# Altium PCB SlowDanceGift2.PcbDoc
Units mm, origin at the board's own origin, x right, y up, seen from the top; angles counter-clockwise.
Board outline 55 x 29.5 mm, 2 copper layers (Top Layer, Bottom Layer); 68 components, 43 nets, 217 pads, 342 vias.
Unrouted connection lines stored in the file: 1.
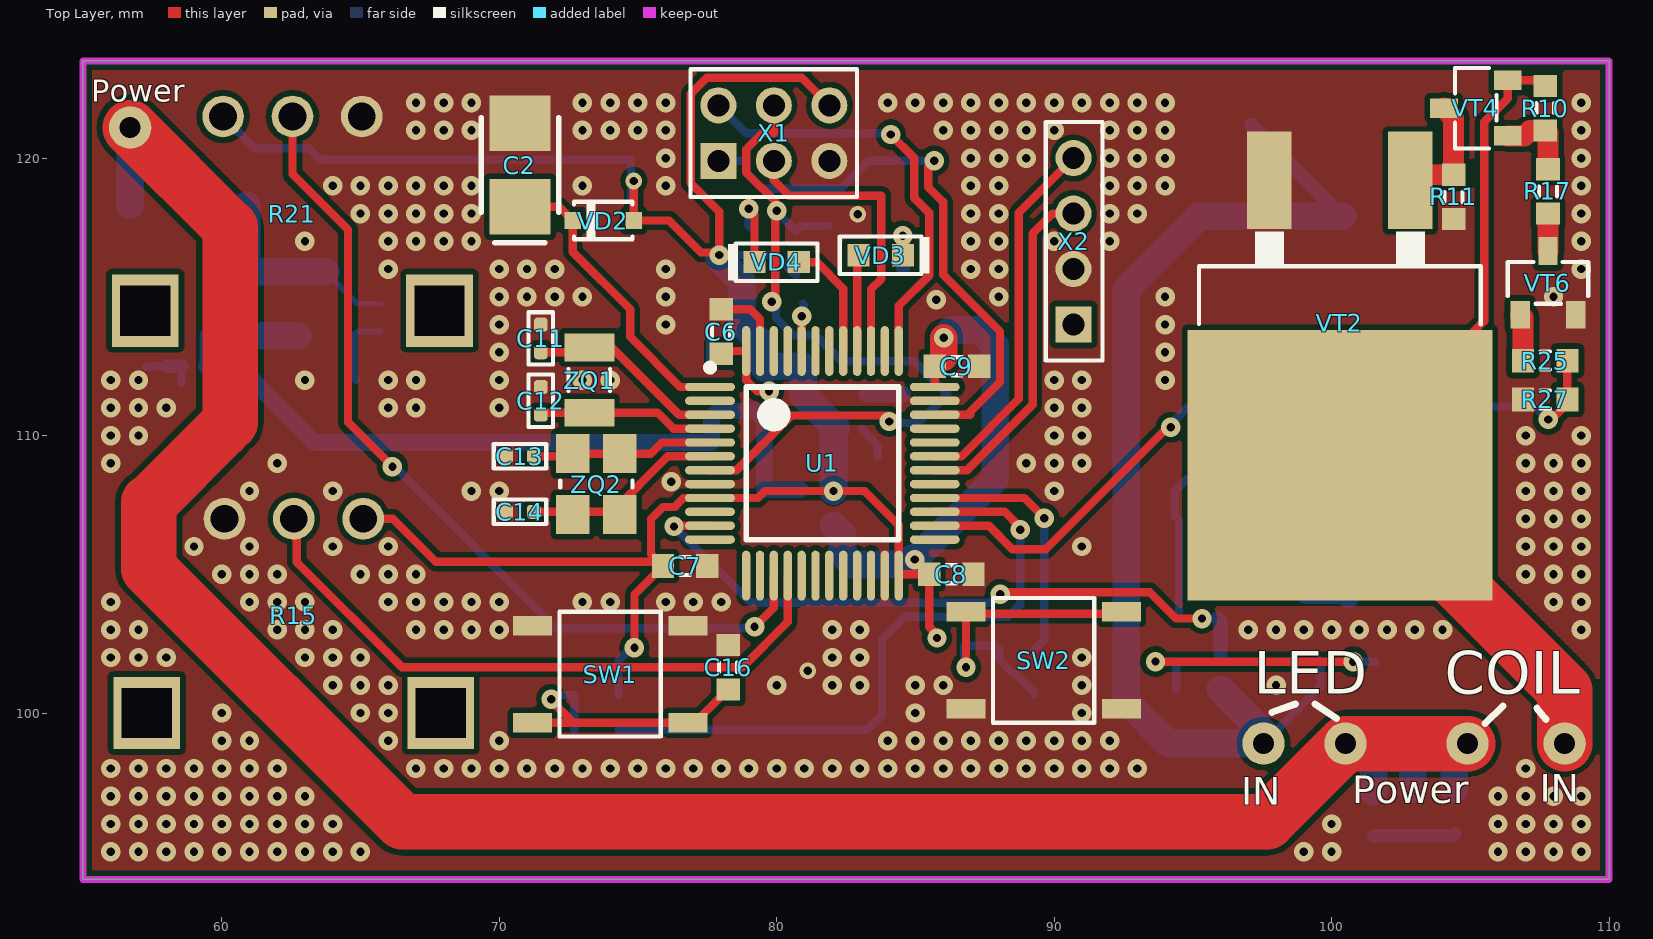
[diagram p0: Top Layer view]
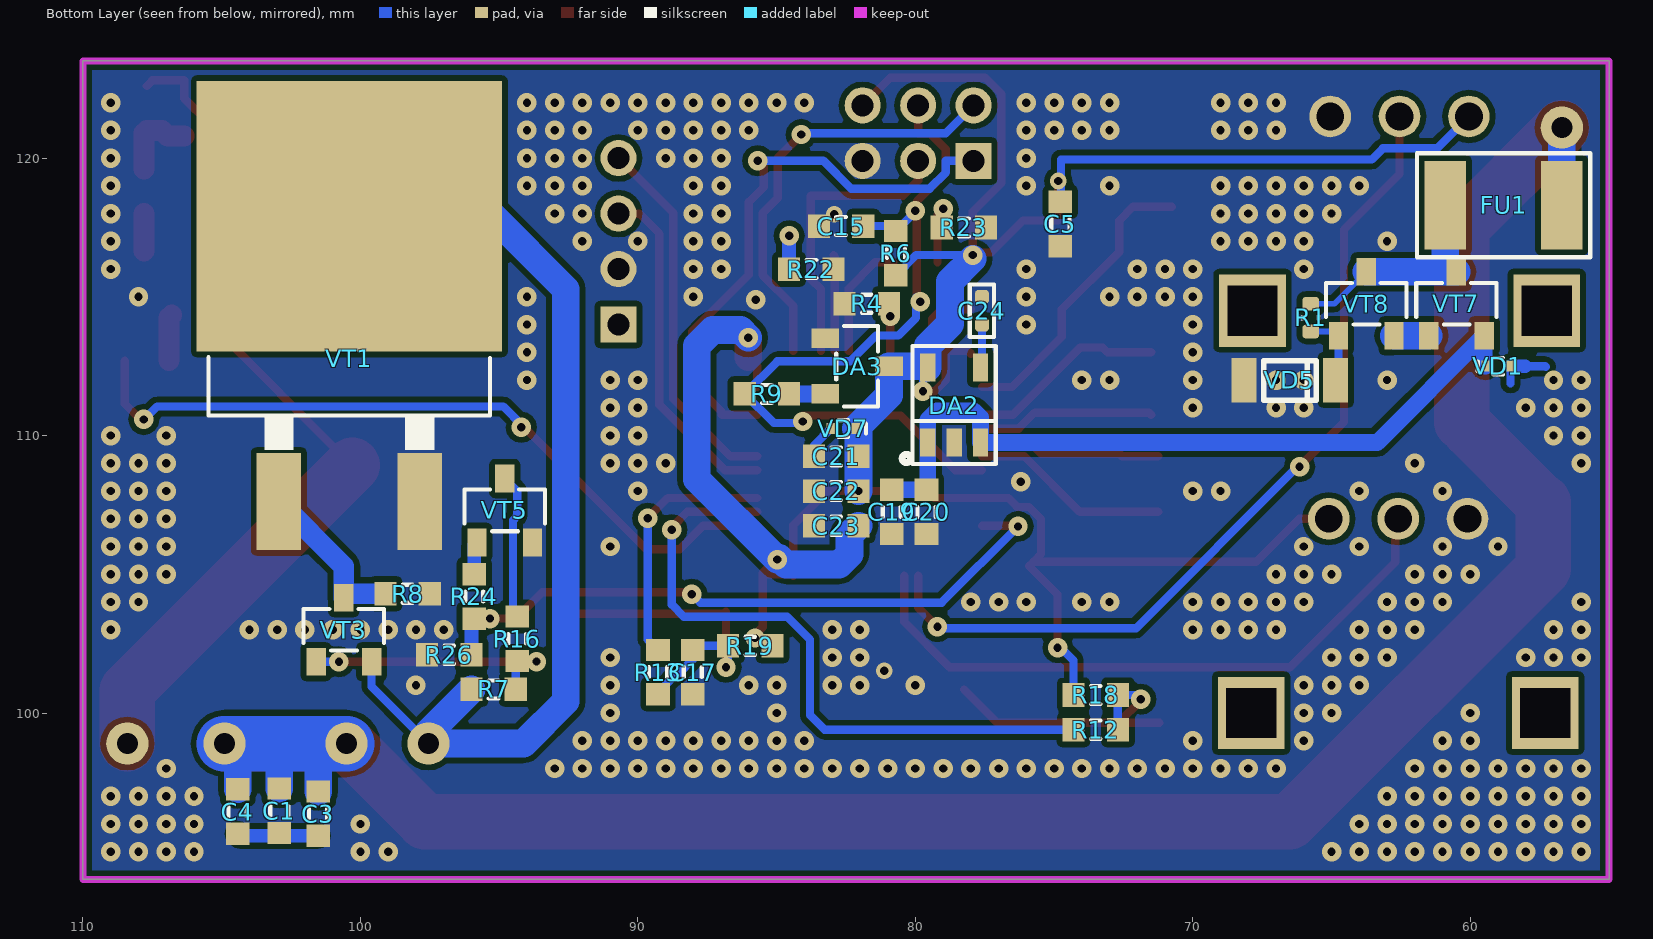
[diagram p1: Bottom Layer view, seen from below]
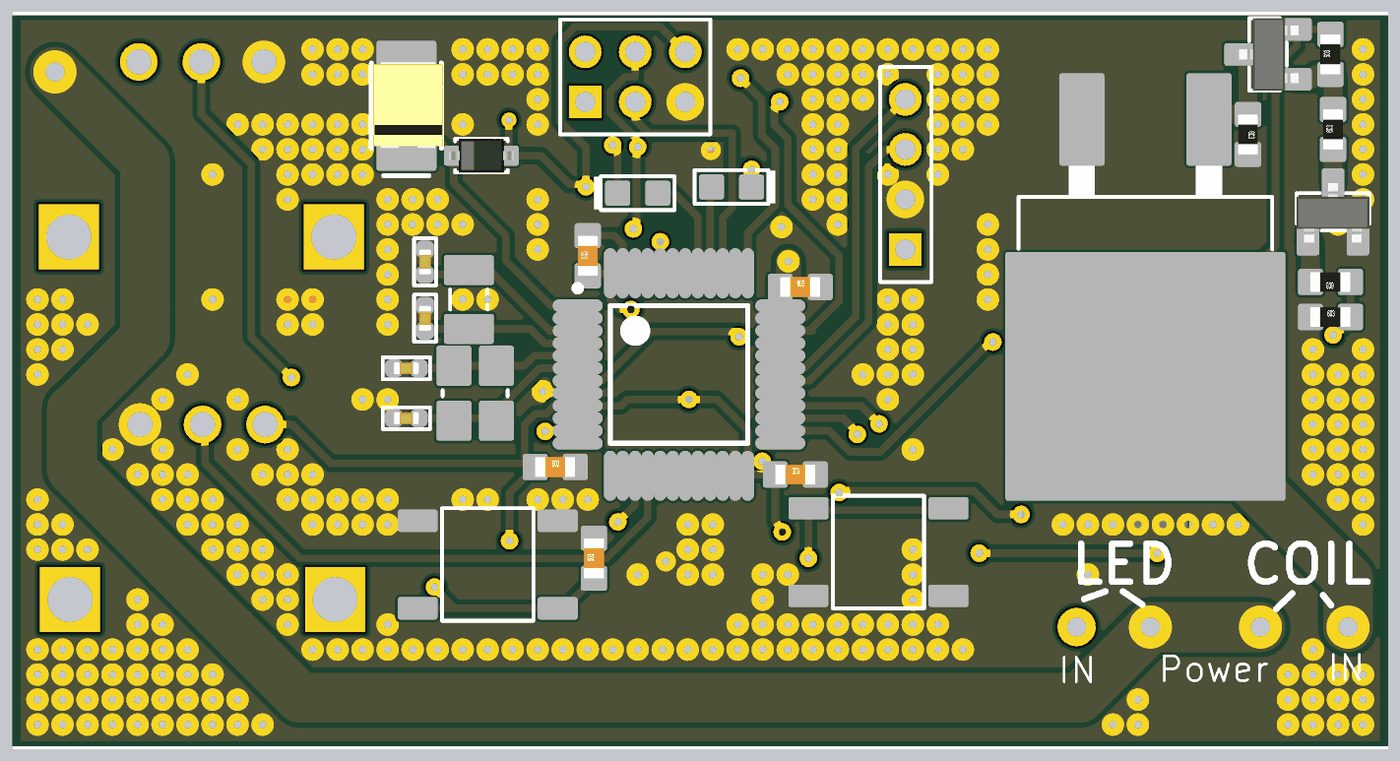
[diagram p2: 3D render of the assembled board from above, using the file's embedded part models]
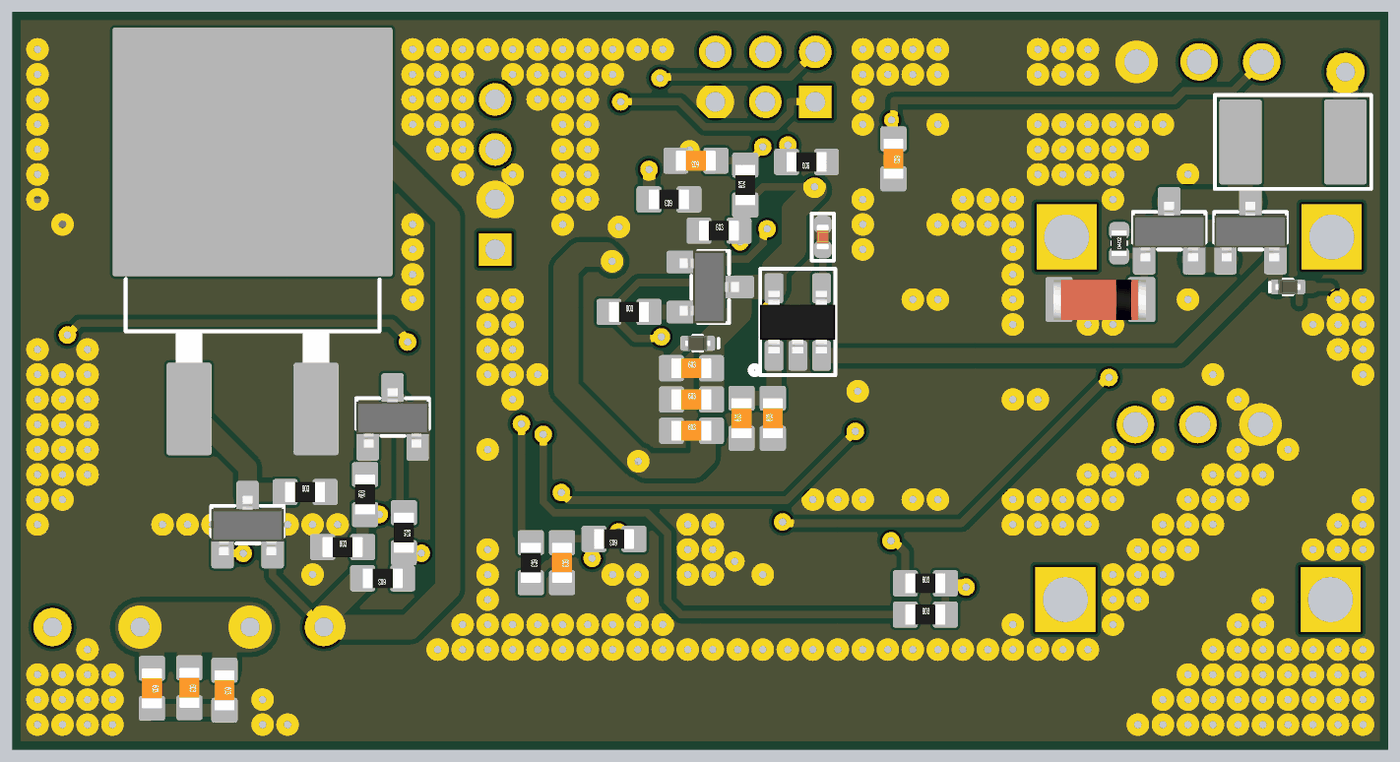
[diagram p3: 3D render of the assembled board from below, using the file's embedded part models]

## Layer stack, top to bottom
Top Solder: solder mask 0.0102, Solder Resist, Dk 3.5
Top Layer: signal copper 0.0356
Dielectric 1: dielectric 0.32, FR-4, Dk 4.8
Bottom Layer: signal copper 0.0356
Bottom Solder: solder mask 0.0102, Solder Resist, Dk 3.5

## Board outline
55,94 110,94 110,123.5 55,123.5

## Design rules (kind name [scope] priority, off if disabled: settings)
Clearance [All] p1: gap=0.2 ignorepadtopadclearanceinfootprint=FALSE except(0: Arc-Hole Track-Hole SMDPad-Hole THPad-Hole Via-Hole Fill-Hole Poly-Hole Region-Hole Text-Hole)
DiffPairsRouting [All] p1: maxlimit=0.254 minlimit=0.1 mostfreqgap=0.2 toplayer_minwidth=0.1 toplayer_maxwidth=0.381 toplayer_prefwidth=0.3 bottomlayer_minwidth=0.1 bottomlayer_maxwidth=0.381 bottomlayer_prefwidth=0.3 maxuncoupledlength=12.7
Height [All] p1: minheight=0 maxheight=30 prefheight=12.7
HoleSize [All] p1: absolutevalues=TRUE maxlimit=2.5 minlimit=0.025 maxpercent=80.000 minpercent=20.000
HoleToHoleClearance [All] p1: gap=0.2 allowstackedmicrovias=TRUE
MatchedLengths [InxSignalClass('All xSignals')] p1: tolerance=1 checknetsindiffpair=TRUE checkdiffpairvsdiffpair=FALSE checkxsignals=FALSE checkothers=FALSE
MinimumSolderMaskSliver [All] p1: minsoldermaskwidth=0.1
PasteMaskExpansion [All] p1: expansion=0.1
PlaneClearance [All] p1: clearance=0.5
PlaneConnect [All] p1: planeconnectstyle=Relief reliefexpansion=0.5 reliefentries=4 reliefconductorwidth=0.2 reliefairgap=0.2
PolygonConnect [All] p1: connectstyle=Direct reliefconductorwidth=0.2 reliefentries=4 polygonreliefangle="90 Angle" airgapwidth=0.2
RoutingVias [All] p1: holewidth=0.3 width=0.7 viastyle="Through Hole" minholewidth=0.3 minwidth=0.7 maxholewidth=0.3 maxwidth=0.7
SilkToSilkClearance [All] p1: silktosilkclearance=0.2
SilkToSolderMaskClearance [IsPad] p1: minsilkscreentomaskgap=0.1 clearancetoexposedcopper=TRUE
SolderMaskExpansion [All] p1: expansion=0.1
UnRoutedNet [All] p1: checkbadconnections=TRUE
Width 3V3 [InNet('3V3')] p1: maxlimit=1 minlimit=0.2 preferedwidth=0.3
Width 5V [InNet('5V')] p2: maxlimit=3 minlimit=0.2 preferedwidth=0.6
Width [All] p3: maxlimit=4 minlimit=0.2 preferedwidth=0.3
19 further rules are at their usual default settings.

## Components (designator, comment, footprint, x,y, rotation, side; value= is the part's Value field where it differs from the comment)
C1 "C0603-X5R-16В-10мФ" C0603_HD 102.925,96.475 r270 bottom value=10мкФ
C2 "Tann B 100 мкФ 6 В" CAP_POL_SIZE_B 70.75,119.75 r90 top value="100 мкФ"
C3 "C0603-X5R-16В-10мФ" C0603_HD 101.525,96.375 r270 bottom value=10мкФ
C4 "C0603-X5R-16В-10мФ" C0603_HD 104.425,96.45 r270 bottom value=10мкФ
C5 "C0603-X7R-50В-0.1мкФ" C0603_HD 74.775,117.625 r270 bottom value="0.1 мкФ"
C6 "C0603-X7R-50В-0.1мкФ" C0603_HD 78,113.75 r90 top value="0.1 мкФ"
C7 "C0603-X7R-50В-0.1мкФ" C0603_HD 76.7,105.3 r0 top value="0.1 мкФ"
C8 "C0603-X7R-50В-0.1мкФ" C0603_HD 86.3,105 r0 top value="0.1 мкФ"
C9 "C0603-X7R-50В-0.1мкФ" C0603_HD 86.5,112.5 r0 top value="0.1 мкФ"
C11 "C0402-X7R-16В-20pF-10%" C0402_HD 71.5,113.5 r270 top value=20пФ
C12 "C0402-X7R-16В-20pF-10%" C0402_HD 71.5,111.25 r270 top value=20пФ
C13 "C0402-X7R-16В-20pF-10%" C0402_HD 70.75,109.25 r0 top value=20пФ
C14 "C0402-X7R-16В-20pF-10%" C0402_HD 70.75,107.25 r0 top value=20пФ
C15 "C0603-X5R-16В-22нФ" C0603_HD 82.675,117.55 r0 bottom value=22нФ
C16 "C0603-X5R-16В-22нФ" C0603_HD 78.25,101.65 r90 top value=22нФ
C17 "C0603-X5R-16В-22нФ" C0603_HD 88.025,101.475 r270 bottom value=22нФ
C19 "C0603-X5R-16В-1мкФ" C0603_HD 80.85,107.25 r90 bottom value="1 мкФ"
C20 "C0603-X5R-16В-0.1мкФ" C0603_HD 79.6,107.25 r90 bottom value="0.1 мкФ"
C21 "C0603-X5R-16В-0.1мкФ" C0603_HD 82.85,109.25 r180 bottom value="0.1 мкФ"
C22 "C0603-X5R-16В-1мкФ" C0603_HD 82.85,108 r180 bottom value="1 мкФ"
C23 "C0603-X5R-16В-10мФ" C0603_HD 82.85,106.75 r180 bottom value=10мкФ
C24 "C0402-X7R-16В-10nF-10%" C0402_HD 77.6,114.5 r90 bottom value=10нФ
DA2 "LP2985-33DBV" "SOT-23-5 (TI)" 79.55,109.75 r180 bottom
DA3 "STM809SWX6F (ST)" SOT-23 82.1,112.5 r270 bottom
FU1 "MF-MSMF020/60-2" MF-MSMF020/60 56.7,118.3 r0 bottom
R1 "R0402-10кОм-5%" R0402_min 65.75,114.25 r90 bottom value=4.7кОм
R4 "R0603-10кОм-5%" R0603_HD 81.75,114.75 r180 bottom value="10 кОм"
R6 "R0603-100кОм-5%" R0603_HD 80.7,116.575 r90 bottom value="100 кОм"
R7 "R0603-100кОм-5%" R0603_HD 95.2,100.85 r0 bottom value=100кОм
R8 "R0603-100кОм-5%" R0603_HD 98.3,104.3 r180 bottom value=100кОм
R9 "R0603-1кОм-5%" R0603_HD 85.35,111.5 r180 bottom value="1 кОм"
R10 "R0603-100кОм-5%" R0603_HD 107.7,121.8 r90 top value=100кОм
R11 "R0603-100кОм-5%" R0603_HD 104.4,118.6 r270 top value=100кОм
R12 "R0603-1кОм-5%" R0603_HD 73.5,99.4 r180 bottom value="1 кОм"
R13 "R0603-1кОм-5%" R0603_HD 89.275,101.475 r270 bottom value="1 кОм"
R15 "R-0904N" R-0904N 62.1,102 r180 top
R16 "R0603-1кОм-5%" R0603_HD 94.35,102.675 r270 bottom value=1кОм
R17 "R0603-1кОм-5%" R0603_HD 107.8,118.8 r90 top value=1кОм
R18 "R0603-100кОм-5%" R0603_HD 73.5,100.65 r180 bottom value=100кОм
R19 "R0603-100кОм-5%" R0603_HD 85.95,102.425 r0 bottom value=100кОм
R21 "R-0904N" R-0904N 62.05,116.5 r180 top
R22 "R0603-100кОм-5%" R0603_HD 83.75,116 r0 bottom value=100кОм
R23 "R0603-100кОм-5%" R0603_HD 78.25,117.5 r0 bottom value=100кОм
R24 "R0603-300Ом-5%" R0603_HD 95.9,104.2 r90 bottom value=300Ом
R25 "R0603-300Ом-5%" R0603_HD 107.7,112.7 r180 top value=300Ом
R26 "R0603-100кОм-5%" R0603_HD 96.8,102.1 r180 bottom value=100кОм
R27 "R0603-100кОм-5%" R0603_HD 107.7,111.3 r0 top value=100кОм
SW1 "SWT-30" SWT-30 74,101.4 r180 top
SW2 "SWT-30" SWT-30 89.625,101.9 r0 top
U1 "STM32F103C6T6A" STM-LQFP48_N 81.65,109 r0 top
VD1 "ESD9L5.0ST5G" "SOD-923 (ON)"#1 59,112.5 r180 bottom
VD2 "BAS16HT1" "SOD323 (SC-76)" 73.75,117.75 r180 top
VD3 "KP1608ZGC" LED_0603 83.75,116.5 r0 top
VD4 "KP1608ZGC" LED_0603 80,116.25 r180 top
VD5 "BZV55-C5V6" sod80c 66.5,112 r180 bottom
VD7 "ESD9L3.3ST5G" "SOD-923 (ON)"#2 82.6,110.25 r0 bottom
VT1 "STB80N20M5" "D2PAK-2 (ST)" 100.4,107.725 r180 bottom
VT2 "STB80N20M5" "D2PAK-2 (ST)" 100.3,119.1 r180 top
VT3 "MMBTA92" SOT-23 100.6,103 r180 bottom
VT4 "MMBTA92" SOT-23 105.2,121.8 r90 top
VT5 "BC817" SOT-23 94.8,107.3 r180 bottom
VT6 "BC817" SOT-23 107.8,115.5 r0 top
VT7 "MMBTA42" SOT-23 60.5,114.75 r180 bottom
VT8 "MMBTA42" SOT-23 63.75,114.75 r180 bottom
X1 "n/m" PLD2-6 77.9,119.9 r0 top
X2 "n/m PLS-4" PLS2-4 90.7,114 r0 top
ZQ1 "DST310S 32.768 kHz, 20ppm, 50 kOhm, 7pF (1TJF0SPDJ1AI00D)" DST310S 73.25,112 r270 top value="32.768 кГц"
ZQ2 "DSX321G 12 MHz, 10ppm@25C, 20ppm@-40+85C, 80 Ohm, 12pF (1C212000AB0AB)" DSX321G 73.5,108.25 r90 top value="12 МГц"

## Footprints (in the part's own frame and the unit in brackets; to place one, negate y for a bottom-side part, rotate by r counter-clockwise, add the part's x,y. Pads: shape width x height; smd on the part's side, far side on the other; paste and mask are expansions set on the pad)
C0402_HD [mm]
  rrect50% 0.5x0.5 smd: 1(0.5,0) 2(-0.5,0)
  silkscreen extent -0.94,-0.44 0.94,0.44, body extent -0.5,-0.25 0.5,0.25, height 0.48
C0603_HD [mm]
  rect 0.8x0.85 smd: 1(-0.8,0) 2(0.8,0)
  silkscreen extent -0.18,-0.33 0.18,0.33, body extent -0.8,-0.4 0.8,0.4, height 0.3
CAP_POL_SIZE_B [mm]
  rect 2x2.2 smd: 1(-1.5,0) 2(1.5,0)
  silkscreen extent -2.8,-1.4 1.7,1.4, body extent -1.72,-1.47 1.77,1.33, height 1.91
"D2PAK-2 (ST)" [mm]
  rect 1.6x3.5 smd: 1(-2.54,-0.1) 3(2.54,-0.1)
  rect 11x9.75 smd: 2(0,10.175)
  silkscreen extent -5.07,1.75 5.07,5.1, body extent -5.08,-1.24 5.08,12.99, height 4.87
DST310S [mm]
  rect 1x1.8 smd: 1(-1.175,0) 2(1.175,0)
  silkscreen extent -0.4,-0.75 0.4,0.75, body extent -1.6,-0.75 1.6,0.75, height 0.85
DSX321G [mm]
  rect 1.4x1.2 smd: 1(-1.1,-0.85) 2(1.1,-0.85) 3(1.1,0.85) 4(-1.1,0.85)
  silkscreen extent -0.13,-1.3 0.13,1.3, body extent -1.6,-1.3 1.6,1.3, height 1
LED_0603 [mm]
  rect 0.8x0.8 smd: 1(-0.8,0) 2(0.8,0)
  silkscreen extent -1.47,-0.67 1.75,0.67, body extent -0.8,-0.4 0.8,0.4, height 1.1
MF-MSMF020/60 [mm]
  rect 1.5x3.2 smd: 1(0,0) 2(4.2,0)
  silkscreen extent -1.02,-1.88 5.23,1.88, body extent -0.63,-1.7 4.83,1.7, height 1
PLD2-6 [mm]
  rect 1.3x1.3 hole 0.8: 1(0,0)
  round 1.3 hole 0.8: 2(0,2) 3(2,0) 4(2,2) 5(4,0) 6(4,2)
  silkscreen extent -1,-1.3 5,3.3
PLS2-4 [mm]
  rect 1.3x1.3 hole 0.8: 1(0,0)
  round 1.3 hole 0.8: 2(0,2) 3(0,4) 4(0,6)
  silkscreen extent -1,-1.3 1.05,7.3
R0402_min [mm]
  rrect50% 0.5x0.6 smd: 1(-0.5,0) 2(0.5,0)
  silkscreen extent -0.1,-0.35 0.1,0.35, body extent -0.52,-0.3 0.52,0.3, height 0.34
R0603_HD [mm]
  rect 0.8x0.85 smd: 1(-0.8,0) 2(0.8,0)
  silkscreen extent -0.18,-0.33 0.18,0.33, body extent -0.8,-0.4 0.8,0.4, height 0.3
R-0904N [mm] "R-0904N-A100K (РП1-74), L25KQ 100 кОм, Резистор переменный"
  round 1.5 hole 1: 1(-3,-5) 2(-0.5,-5) 3(2,-5)
  rect 2.4x2.6 hole 1.8 square: ""(-5.8,2) ""(4.8,2)
sod80c [mm]
  rect 0.9x1.6 smd: 1(-1.65,0) 2(1.65,0)
  silkscreen extent -0.95,-0.72 0.95,0.7, body extent -1.88,-0.81 1.82,0.79, height 1.61
"SOD323 (SC-76)" [mm]
  rect 0.6x0.6 smd: 1(-1.1,0) 2(1.1,0)
  silkscreen extent -1.05,-0.75 1.05,0.67, body extent -1.3,-0.68 1.3,0.68, height 1.1
"SOD-923 (ON)"#1 [mm]
  rect 0.3x0.4 smd mask+0.05: 1(-0.45,0) 2(0.45,0)
  Top Layer pour cut-out: -0.075,-0.375 -0.825,-0.375 -0.825,0.375 -0.075,0.375
  Top Layer pour cut-out: 0.075,0.375 0.825,0.375 0.825,-0.375 0.075,-0.375
  silkscreen extent -0.73,-0.3 0.18,0.3, body extent -0.5,-0.3 0.5,0.3, height 0.4
"SOD-923 (ON)"#2 [mm]
  rect 0.3x0.4 smd: 1(-0.45,0) 2(0.45,0)
  silkscreen extent -0.82,-0.3 0.18,0.3, body extent -0.5,-0.3 0.5,0.3, height 0.4
SOT-23 [mm]
  rect 0.7x1 smd: 1(-1,-1.15) 2(1,-1.15) 3(0,1.15)
  silkscreen extent -1.45,-0.75 1.45,0.75, body extent -1.45,-1.22 1.45,1.15, height 1
"SOT-23-5 (TI)" [mm]
  rect 0.55x1 smd: 1(0,0) 2(0.95,0) 3(1.9,0) 4(1.9,2.7) 5(0,2.7)
  silkscreen extent -0.93,-0.77 2.45,3.47, body extent -0.55,0.1 2.45,2.6, height 1.05
STM-LQFP48_N [mm] "QFP, 48-Leads, Body 7x7mm, Pitch 0.5mm, IPC Medium Density"
  oval 1.8x0.3 smd: 1(-4.05,2.75) 2(-4.05,2.25) 3(-4.05,1.75) 4(-4.05,1.25) 5(-4.05,0.75) 6(-4.05,0.25) 7(-4.05,-0.25) 8(-4.05,-0.75) 9(-4.05,-1.25) 10(-4.05,-1.75) 11(-4.05,-2.25) 12(-4.05,-2.75) 25(4.05,-2.75) 26(4.05,-2.25) 27(4.05,-1.75) 28(4.05,-1.25) 29(4.05,-0.75) 30(4.05,-0.25) 31(4.05,0.25) 32(4.05,0.75) 33(4.05,1.25) 34(4.05,1.75) 35(4.05,2.25) 36(4.05,2.75)
  oval 0.3x1.8 smd: 13(-2.75,-4.05) 14(-2.25,-4.05) 15(-1.75,-4.05) 16(-1.25,-4.05) 17(-0.75,-4.05) 18(-0.25,-4.05) 19(0.25,-4.05) 20(0.75,-4.05) 21(1.25,-4.05) 22(1.75,-4.05) 23(2.25,-4.05) 24(2.75,-4.05) 37(2.75,4.05) 38(2.25,4.05) 39(1.75,4.05) 40(1.25,4.05) 41(0.75,4.05) 42(0.25,4.05) 43(-0.25,4.05) 44(-0.75,4.05) 45(-1.25,4.05) 46(-1.75,4.05) 47(-2.25,4.05) 48(-2.75,4.05)
  silkscreen extent -4.17,-2.75 2.75,3.57, body extent -3.5,-3.5 3.5,3.5, height 1.6
SWT-30 [mm]
  rect 1.4x0.7 smd: 1(-2.8,-1.75) 1(2.8,-1.75) 2(-2.8,1.75) 2(2.8,1.75)
  silkscreen extent -1.83,-2.25 1.83,2.25, body extent -1.83,-2.25 1.83,2.25, height 1.5

## Part data
C1 C3 C4 C15 C16 C17 C19 C20 C21 C22 C23: library part C0603_HD
C2: library part CAP_TANT_B
C5 C6 C7 C8 C9: library part C0603
C11 C12 C13 C14 C24: library part C0402
DA2: library part LP2985-xxDBV
DA3: library part LM809M3-2.93
FU1: library part MF-MSMF
R1: library part R0402
R4 R6 R7 R8 R9 R10 R11 R12 R13 R16 R17 R18 R19 R22 R23 R24 R25 R26 R27: library part R0603
R15 R21: "R-0904N-A100K resistor 500omh-100komh", Max value=100кОм, Min value=500Ом, Rated power=50mW, Tolerance=20%, Rot.angle="280 +- 10"
U1: "ARM Cortex-M3 32-bit MCU, 32 KB Flash, 10 KB Internal RAM, 37 I/Os, 48-pin LQFP, -40 to 85 degC, Tray", I/Os (High Current)=37, Operating Frequency(F) (Processor speed) (MHz)=72, Supplier Part Number 1=497-11515-ND, Supply Voltage(Vcc) min (V)=2, A/D Converter="2x12-bit (10 Channel)", ComponentLink1Description="Manufacturer URL", ComponentLink1URL=http://www.st.com/web/en/home.html, ComponentLink2Description=Datasheet, ComponentLink2URL=http://www.st.com/st-web-ui/static/active/en/resource/technical/document/datasheet/CD00210843.pdf, ComponentLink3Description="Package Specification", ComponentLink3URL=http://www.st.com/st-web-ui/static/active/en/resource/technical/document/datasheet/DM00058181.pdf, Core="ARM Cortex-M3", DatasheetVersion="Rev. 6", FLASH Size (Prog) (kB)=32, Internal RAM Size (kB)=10, Mounting Technology="Surface Mount", PackageDescription="48-Pin Low Profile Quad Flat Package, 7 x 7 mm Body, 0.5 mm Pitch", PackageReference=LQFP48, PackageVersion="Rev. 6, 06/2013", Packing=Tray, PartNumber=STM32F103C6T6A, Supplier 1=Digi-Key, Supplier 2=Farnell, Supplier 3=Newark, Supplier 4=Newark, Supplier 5=Mouser, Supplier Part Number 2=1972391, Supplier Part Number 3=72T2643, Supplier Part Number 4=57P1219, Supplier Part Number 5=511-STM32F103C6T6A
VD2: library part BAS16H
VD3 VD4: library part LED_0603
VD5: library part BZV55
VT3 VT4: library part MMBT5401
VT7 VT8: library part MMBT5551
X1: library part PLD2-6
X2: library part PLS2-4
ZQ2: library part DSX321G

## Free pads (board coordinates)
  round 1.524 hole 0.762: 2(56.7,121.1) 3(97.55,98.9) 4(108.4,98.9) 5(100.5,98.9) 5(104.9,98.9)

## Via types
v1: diameter 0.7, hole 0.3, Top Layer to Bottom Layer, 339 vias
v2: diameter 0.6, hole 0.3, Top Layer to Bottom Layer, 3 vias

## Nets (pads, with @x,y where several pads share a name; then routed paths per layer and width w, separated by ;. In a path a pad name is that pad's centre, name@x,y a point inside that pad or via, vN(x,y) a via of type N, cw(c..) or ccw(c..) an arc to the next point about the centre after c; other vN are vias at no path point)
3V3: C5.1 C6.1 C7.1 C8.1 C9.1 C21.2 C22.2 C23.2 DA2.5 DA3.3 R6.1 R15.1 R18.1 R19.1 R21.3 U1.9 U1.24 U1.36 U1.48 VD2.1 VD7.1 X1.6 | length 102.9
  Top Layer w0.3: R15.1 66.175,107 67.725,105.45 C7.1@75.75,105.45 ; v2(74.85,119.175) VD2.1 76.125,117.75 77.275,116.6 v1@77.834,116.6 ; v1(74.875,102.35) 74.875,104.275 C7.1 C7.1@75.75,105.45 ; v1(77.929,116.506) 77.929,118.076 76.9,119.105 76.9,122.314 77.486,122.9 80.9,122.9 X1.6 ; C6.1 78.1,113.05 U1.48 78.9,112 79.3,111.6 v1(79.727,111.6) ; v1(84.979,105.53) 85,105.551 85.5,105.051 C8.1 ; U1.36 C9.1 ; v1(85.779,102.705) 85.779,102.821 85.5,103.1 C8.1 ; C7.1@75.75,105.45 75.475,105.725 75.475,107 75.9,107.425 76.35,107.425 76.35,107.457 76.643,107.75 U1.9 79.325,107.75 79.575,108 v1(82.05,108) 83.175,108 84.4,106.775 U1.24 84.45,105 C8.1
  Top Layer w1: C9.1@86.026,112.826 v1(86.026,113.526)
  Bottom Layer w0.3: R21.3 61.2,120.35 63.15,120.35 63.55,119.95 74.75,119.95 74.75,118.45 C5.1 ; R18.1 74.3,101.9 74.75,102.35 v1(74.875,102.35) ; v1(77.929,116.506) 79.969,116.506 R6.1 ; DA2.5 79.727,112.273 v1(79.727,111.6) ; v1@84.909,105.6 v1(84.979,105.53)
  Bottom Layer w1: v1@77.929,116.375 78.75,115.554 78.75,114.025 79.55,113.225 DA2.5 79.6,112.5 DA3.3 80.95,111.45 VD7.1 82.05,110.15 C21.2 v1(82.05,108) ; C23.2 82.375,106.425 82.375,105.725 82.75,105.35 84.659,105.35 v1@84.909,105.6 ; v1(84.979,105.53) 87.875,108.426 87.875,113.225 87.3,113.8 86.3,113.8 v1(86.026,113.526)
5V: C19.2 C20.2 DA2.1 DA2.3 VD1.1 VT7.2 | length 27.7
  Bottom Layer w0.6: VD1.1 59.5,112.55 VT7.2 63.35,109.75 DA2.3 77.65,110.65 77.9,110.9 79.225,110.9 79.55,110.575 DA2.1 79.55,108.1 C20.2 C19.2
GND: C1.2 C2.2 C3.2 C4.2 C5.2 C6.2 C7.2 C8.2 C9.2 C11.2 C12.2 C13.2 C14.2 C15.2 C16.2 C17.2 C19.1 C20.1 C21.1 C22.1 C23.1 C24.1 DA2.2 DA3.1 R4.1 R8.2 R11.2 R15.3 R21.1 R22.1 R23.1 R26.1 R27.1 SW1.1 SW2.1 U1.8 U1.23 U1.35 U1.47 VD1.2 VD5.1 VD7.2 VT1.3 VT2.3 VT5.2 VT6.2 X1.5 X2.2 | length 8.8
  Top Layer w0.3: C6.2 79.05,114.55 79.4,114.2 U1.47
  Bottom Layer w0.3: 57.275,112.475 57.3,112.5 58.025,112.5 ; 58.55,111.875 VD1.2 ; VD7.2 83.65,109.65 C21.1
  Bottom Layer w0.5: 58.025,112.5 VD1.2 ; C3.2 104.35,95.575 C4.2
  other v1: 56,95 57,95 58,95 59,95 60,95 61,95 62,95 63,95 64,95 65,95 99,95 100,95 106,95 107,95 108,95 109,95 56,96 57,96 58,96 59,96 60,96 61,96 62,96 63,96 64,96 100,96 106,96 107,96 108,96 109,96 56,97 57,97 58,97 59,97 60,97 61,97 62,97 63,97 106,97 107,97 108,97 109,97 56,98 57,98 58,98 59,98 60,98 61,98 62,98 67,98 68,98 69,98 70,98 71,98 72,98 73,98 74,98 75,98 76,98 77,98 78,98 79,98 80,98 81,98 82,98 83,98 84,98 85,98 86,98 87,98 88,98 89,98 90,98 91,98 92,98 93,98 107,98 60,99 61,99 66,99 70,99 84,99 85,99 86,99 87,99 88,99 89,99 90,99 91,99 92,99 60,100 65,100 66,100 85,100 91,100 64,101 65,101 66,101 80,101 82,101 83,101 85,101 86,101 91,101 98,101 56,102 57,102 58,102 63,102 64,102 65,102 82,102 83,102 91,102 56,103 57,103 62,103 63,103 64,103 67,103 68,103 69,103 70,103 82,103 83,103 97,103 98,103 99,103 100,103 101,103 102,103 103,103 104,103 109,103 56,104 61,104 62,104 63,104 66,104 67,104 68,104 69,104 70,104 73,104 74,104 76,104 77,104 78,104 108,104 109,104 60,105 61,105 62,105 65,105 66,105 67,105 107,105 108,105 109,105 59,106 61,106 64,106 66,106 91,106 107,106 108,106 109,106 107,107 108,107 109,107 61,108 64,108 69,108 70,108 90,108 107,108 108,108 109,108 76.204,108.33 56,109 62,109 89,109 90,109 91,109 107,109 108,109 109,109 56,110 57,110 90,110 91,110 107,110 109,110 56,111 57,111 58,111 66,111 67,111 70,111 90,111 91,111 56,112 57,112 63,112 66,112 67,112 70,112 73,112 74,112 90,112 91,112 94,112 70,113 94,113 70,114 76,114 94,114 85.75,114.9 70,115 71,115 72,115 73,115 76,115 88,115 94,115 108,115 66,116 70,116 71,116 72,116 76,116 87,116 88,116 109,116 63,117 66,117 67,117 68,117 69,117 87,117 88,117 90,117 92,117 109,117 65,118 66,118 67,118 68,118 69,118 87,118 88,118 92,118 93,118 109,118 64,119 65,119 66,119 67,119 68,119 69,119 73,119 76,119 87,119 88,119 92,119 93,119 94,119 109,119 76,120 87,120 88,120 89,120 92,120 93,120 94,120 109,120 67,121 68,121 69,121 73,121 74,121 75,121 76,121 86,121 87,121 88,121 89,121 90,121 92,121 93,121 94,121 109,121 67,122 68,122 69,122 73,122 74,122 75,122 76,122 84,122 85,122 86,122 87,122 88,122 89,122 90,122 91,122 92,122 93,122 94,122 109,122
  other v2: 81.125,101.525 82.925,117.975
NetC2_1: C2.1 U1.1 VD2.2 | length 10.8
  Top Layer w0.3: C2.1 72.15,118.25 VD2.2 72.65,116.625 74.725,114.55 74.725,113.55 76.525,111.75 U1.1
NetC11_1: C11.1 U1.3 ZQ1.1 | length 7.2
  Top Layer w0.3: C11.1 73.075,113 ZQ1.1 74.057,113.175 76.482,110.75 U1.3
NetC12_1: C12.1 U1.4 ZQ1.2 | length 6.4
  Top Layer w0.3: C12.1 71.575,110.825 ZQ1.2 75.7,110.825 76.275,110.25 U1.4
NetC13_1: C13.1 U1.5 ZQ2.2 ZQ2.3 | length 6.6
  Top Layer w0.3: C13.1 72.55,109.25 ZQ2.3 ZQ2.2 75.468,109.35 75.868,109.75 U1.5
NetC14_1: C14.1 U1.6 ZQ2.1 ZQ2.4 | length 7.2
  Top Layer w0.3: C14.1 74.075,107.25 76.075,109.25 U1.6
NetC16_1: C16.1 R12.2 R18.2 SW1.2 | length 10.9
  Top Layer w0.3: SW1.2@71.2,99.65 72.675,99.65 ; v1(71.875,100.5) 71.85,100.475 72.675,99.65 ; C16.1 77.05,99.65 76.8,99.65 72.675,99.65
  Bottom Layer w0.3: v1(71.875,100.5) 72.025,100.65 R18.2 R12.2
NetC17_1: C17.1 R13.2 R19.2 SW2.2 | length 12
  Top Layer w0.3: v1(86.825,101.65) 86.825,103.65 86.895,103.58 92.355,103.58 SW2.2@92.425,103.65
  Bottom Layer w0.3: v1(86.825,101.65) 86.75,101.725 R19.2 87.875,102.425 C17.1 88.025,101.925 88.525,101.425 88.595,101.425 89.275,100.745 R13.2
NetC24_2: C24.2 DA2.4 | length 1.6
  Bottom Layer w0.3: C24.2 77.6,112.5 DA2.4
NetDA3_2: DA3.2 R9.2 | length 1.3
  Bottom Layer w0.6: DA3.2 R9.2
NetFU1_2: FU1.2 R1.2 VT7.3 VT8.3 | length 8.1
  Bottom Layer w0.2: VT8.3 64.9,114.75 R1.2
  Bottom Layer w0.3: FU1.2@60.5,117.9 FU1.2
  Bottom Layer w1: VT7.3 VT8.3 ; 60.9,116.5 FU1.2
NetR1_1: R1.1 VD5.2 VT8.1 | length 2.7
  Bottom Layer w0.2: VT8.1 64.9,113.75 R1.1
  Bottom Layer w0.3: VT8.1 64.75,112.1 VD5.2
NetR4_2: R4.2 U1.44 | length 1.9
  Top Layer w0.3: U1.44 80.9,114.302 v1(80.904,114.306)
  Bottom Layer w0.3: v1(80.904,114.306) 80.975,114.235 80.975,114.725 R4.2
NetR7_1: R7.1 R16.2 VT3.1 | length 9.7
  Top Layer w0.3: v1(93.655,101.855) 93.66,101.85 v1(100.775,101.85)
  Bottom Layer w0.3: v1(93.655,101.855) 94.33,101.855 R16.2 94.4,101.825 R7.1 ; v1(100.775,101.85) VT3.1
NetR7_2: pad.3 R7.2 VT1.2 VT3.2 | length 40.4
  Bottom Layer w0.3: pad.3 99.6,100.95 VT3.2 VT3.2@99.55,101.9
  Bottom Layer w0.5: VT1.2@97.1,121.2 VT1.2
  Bottom Layer w1: R7.2 97.55,99.3 pad.3 94.125,98.9 92.6,100.425 92.6,115.275 95.225,117.9 VT1.2
NetR8_1: R8.1 VT1.1 VT3.3 | length 6
  Bottom Layer w0.75: R8.1 100.45,104.3 VT3.3 100.6,105.285 VT1.1
NetR10_1: R10.1 R17.2 VT4.1 | length 2.9
  Top Layer w0.75: VT4.1 106.95,120.8 107.15,121 R10.1 107.8,120.9 R17.2
NetR10_2: pad.4 R10.2 VT2.2 VT4.2 | length 31.2
  Top Layer w0.3: VT2.2 105.5,114.125 105.5,121.295 106.35,122.145 VT4.2 107.5,122.8 R10.2
  Top Layer w2: VT2.2 108.4,100.825 pad.4
NetR11_1: R11.1 VT2.1 VT4.3 | length 4.2
  Top Layer w0.75: VT2.1 103.04,119.4 R11.1 104.4,121.45 VT4.3
NetR12_1: R12.1 U1.27 | length 24.1
  Top Layer w0.3: U1.27 88.225,107.25 88.779,106.696 v1(88.779,106.605)
  Bottom Layer w0.3: R12.1 83.275,99.4 83.8,99.925 83.8,102.65 84.625,103.475 88.35,103.475 88.779,103.904 v1(88.779,106.605) v1@88.825,106.56
NetR13_1: R13.1 U1.28 | length 9.2
  Top Layer w0.3: U1.28 88.925,107.75 v1(89.65,107.025)
  Bottom Layer w0.3: R13.1 89.65,102.65 v1(89.65,107.025)
NetR15_2: R15.2 U1.16 | length 23.2
  Top Layer w0.3: R15.2 62.7,106.9 62.7,105.45 66.5,101.65 78.77,101.65 80.4,103.28 U1.16
NetR16_1: R16.1 VT5.3 | length 5.3
  Bottom Layer w0.3: R16.1 94.5,103.625 94.5,106.945 94.35,107.095 94.35,108 VT5.3
NetR17_1: R17.1 VT6.3 | length 1.3
  Top Layer w0.75: VT6.3 R17.1
NetR21_2: R21.2 U1.15 | length 31.7
  Top Layer w0.3: R21.2 62.55,119.425 64.55,117.425 64.55,110.484 v1(66.153,108.88) ; v1(79.204,103.105) 79.9,103.8 U1.15
  Bottom Layer w0.3: v1(66.153,108.88) 66.22,108.88 72.05,103.05 79.149,103.05 v1(79.204,103.105)
NetR22_2: R22.2 VD3.2 | length 1.9
  Top Layer w0.5: VD3.2 v1(84.55,117.2)
  Bottom Layer w0.5: R22.2 v1(84.55,117.2)
NetR23_2: R23.2 VD4.2 | length 2.7
  Top Layer w0.3: v1(79,118.175) 79.2,117.975 VD4.2
  Bottom Layer w0.3: v1(79,118.175) 79,117.55 R23.2
NetR24_1: R24.1 R26.2 U1.11 | length 23.9
  Top Layer w0.3: v1(76.3,106.725) 76.325,106.75 U1.11 ; v1(88.054,104.28) 88.124,104.35 93.45,104.35 94.395,103.405 v1(95.33,103.405)
  Bottom Layer w0.3: v1(76.3,106.725) 79.05,103.975 87.749,103.975 v1(88.054,104.28) ; v1@95.325,103.4 R24.1 ; v1@95.325,103.4 v1(95.33,103.405)
  Bottom Layer w0.5: R24.1 96,103.3 R26.2
NetR24_2: R24.2 VT5.1 | length 1.2
  Bottom Layer w0.5: VT5.1 95.9,106.05 R24.2
NetR25_1: R25.1 R27.2 U1.26 | length 27.3
  Top Layer w0.3: U1.26 87.645,106.75 88.489,105.905 89.705,105.905 94.1,110.3 v1(94.2,110.3) ; v1(107.805,110.58) 107.93,110.58 108.5,111.15 R27.2 R25.1
  Bottom Layer w0.3: v1@94.15,110.35 94.85,111.05 107.325,111.05 107.795,110.58 v1(107.805,110.58)
NetR25_2: R25.2 VT6.1 | length 1.7
  Top Layer w0.75: VT6.1 106.9,114.25 R25.2
NetU1_30: U1.30 X2.3 | length 12.4
  Top Layer w0.3: U1.30 86.864,108.75 89.225,111.111 89.225,117.275 89.95,118 X2.3
NetU1_31: U1.31 X2.4 | length 13.4
  Top Layer w0.3: U1.31 86.657,109.25 88.725,111.318 88.725,118.025 X2.4
NetU1_34: U1.34 X1.1 | length 20.9
  Top Layer w0.3: v1(85.679,119.906) 85.46,119.687 85.46,118.965 86,118.425 86,115.8 88.05,113.75 88.05,111.93 86.975,110.855 86.975,110.75 U1.34
  Bottom Layer w0.3: X1.1 77.906,119.906 78.9,119.906 78.9,119.486 79.486,118.9 82.314,118.9 83.32,119.906 v1(85.679,119.906)
NetU1_37: U1.37 X1.2 | length 15.5
  Top Layer w0.3: v1(84.11,120.85) 84.96,120 84.96,118.565 85.5,118.025 85.5,115.775 84.4,114.675 U1.37
  Bottom Layer w0.3: X1.2 78.9,120.9 84.06,120.9 v1(84.11,120.85)
NetU1_39: U1.39 X1.3 | length 10.6
  Top Layer w0.3: X1.3 79.9,119.193 80.448,118.645 83.775,118.645 83.775,115.65 83.4,115.275 U1.39
NetU1_40: U1.40 VD3.1 | length 3.5
  Top Layer w0.3: U1.40 82.9,116.45 VD3.1
NetU1_41: U1.41 VD4.1 | length 4.2
  Top Layer w0.3: VD4.1 81.45,116.25 82.4,115.3 U1.41
NetVT7_1: VT7.1 VT8.2 | length 1.2
  Bottom Layer w1: VT7.1 VT8.2
Power: C1.1 C3.1 C4.1 FU1.1 pad.2 pad.5 | length 83
  Top Layer w2: pad.2 60.3,117.5 60.3,110.475 ; 60.025,110.2 57.425,107.6 57.375,107.6 57.375,105.2 66.5,96.075 97.675,96.075 100.5,98.9 pad.5@104.9,98.9
  Bottom Layer w1: FU1.1 pad.2 ; C3.1 101.525,98.75 ; 102.775,98.9 102.925,98.75 C1.1 ; C4.1 104.425,98.425 pad.5@104.9,98.9
  Bottom Layer w2: pad.5@100.5,98.9 102.775,98.9 pad.5@104.9,98.9
Reset: C15.1 R6.2 R9.1 U1.7 X1.4 | length 28.5
  Top Layer w0.3: U1.7 78.557,108.75 80.532,110.725 84.05,110.725 84.05,110.509 v1(84.054,110.505) ; v1(79.825,114.825) 79.95,114.95 v1@79.95,118.103 ; X1.4 79.9,120.9 79.486,120.9 78.9,120.314 78.9,119.486 79.933,118.453
  Bottom Layer w0.3: v1(79.825,114.825) 79.975,114.975 79.975,114.245 80.614,113.606 81.419,113.606 82.35,112.675 84.975,112.675 R9.1 85.1,110.45 84.109,110.45 v1(84.054,110.505) ; v1(80,118.103) 79.978,118.103 79.975,118.1 R6.2 80.875,117.55 C15.1
pads on no net: R15. R21. U1.2 U1.10 U1.12 U1.13 U1.14 U1.17 U1.18 U1.19 U1.20 U1.21 U1.22 U1.25 U1.29 U1.32 U1.33 U1.38 U1.42 U1.43 U1.45 U1.46 X2.1

## Polygon pours and split planes (outlines as drawn)
GND on Bottom Layer "Bottom Layer-GND" (solid, remove dead copper, pour order 12): 55,123.5 110,123.5 110,94 55,94
GND on Top Layer "Bottom Layer-GND" (solid, remove dead copper, pour order 8): 55.15,123.375 55.375,123.6 110.05,123.6 110.05,94.075 110.125,94 54.825,94

## Keep-outs
Keep-Out Layer:
  lines w0.254: 55,94 55,123.5 110,123.5 110,100 110,94 55,94

## Silkscreen, mask and mechanical layers (free items; w line width, h text height)
Top Overlay:
  lines w0.254: 97.85,100.025 98.7,100.325 ; 99.4,100.325 100.175,99.8 ; 105.525,99.625 106.175,100.25 ; 107.4,100.175 107.725,99.775
  text "Power" at 55.3,122.025 h0.8
  text "LED" at 97.2,100.7 h1.52
  text "COIL" at 104.075,100.7 h1.52
  text "IN" at 107.5,96.8 h1
  text "Power" at 100.75,96.75 h1
  text "IN" at 96.75,96.7 h1

## Dimensions
55,123.5 to 110,94 on Top Overlay
55,123.5 to 110,94 on Top Overlay